# Altium PCB PCB1.PcbDoc
Units mil, origin at the board's own origin, x right, y up, seen from the top; angles counter-clockwise.
Board outline 3149.61 x 3937.01 mil, 2 copper layers (Top Layer, Bottom Layer); 99 components, 61 nets, 308 pads, 758 vias.
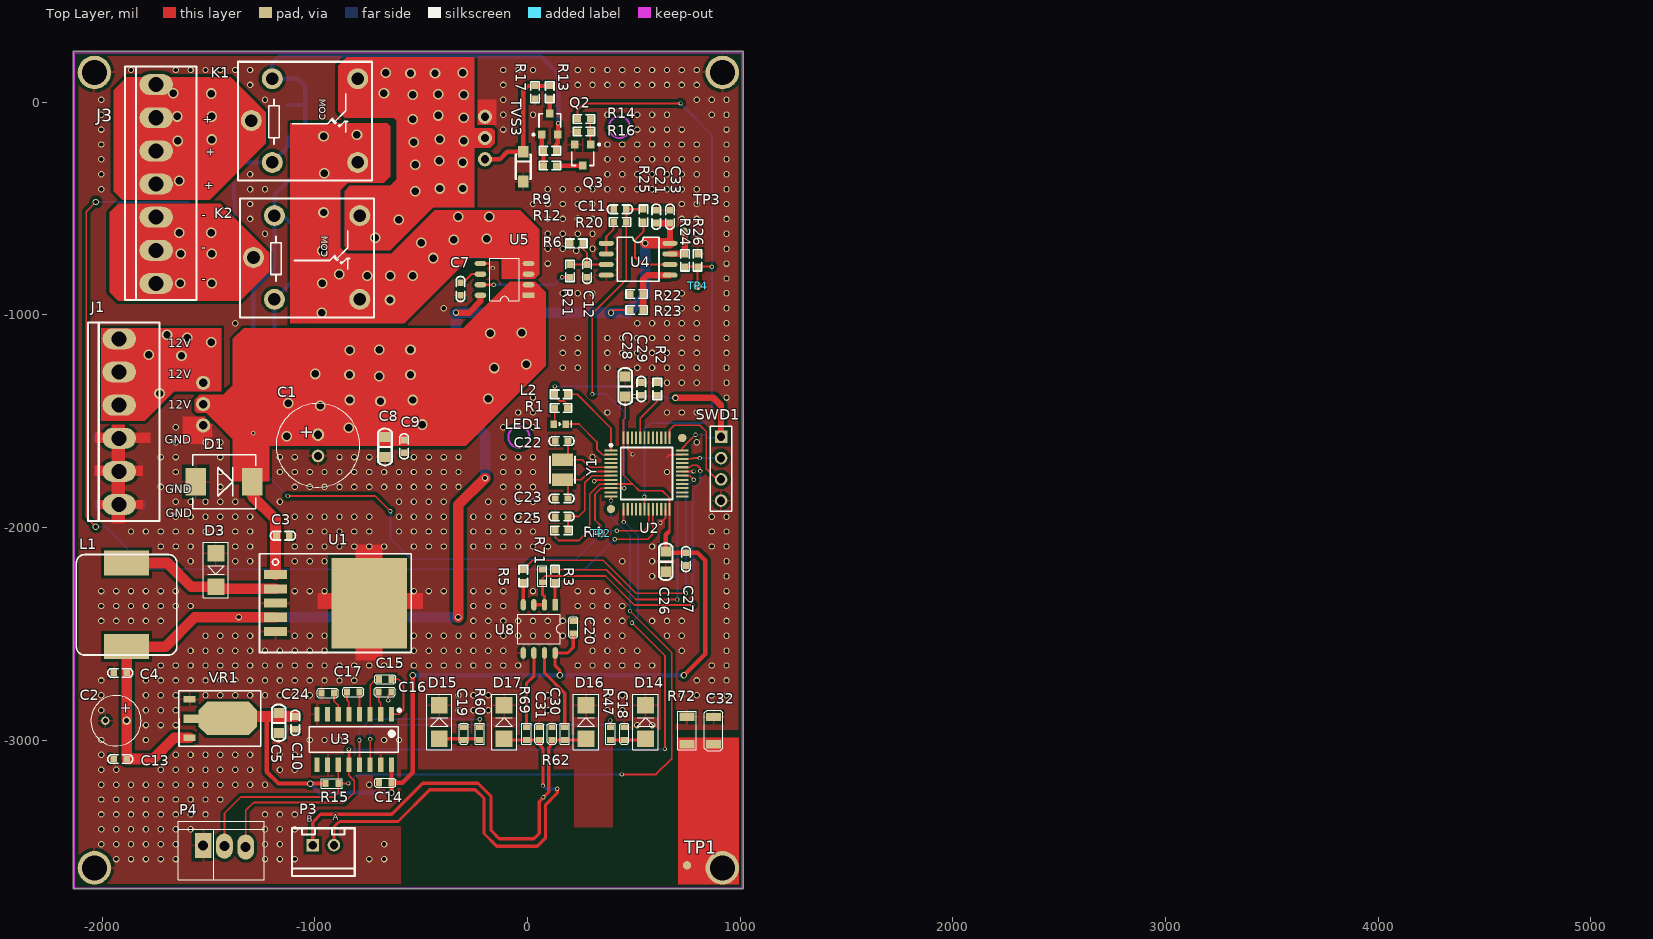
[diagram p0: Top Layer view]
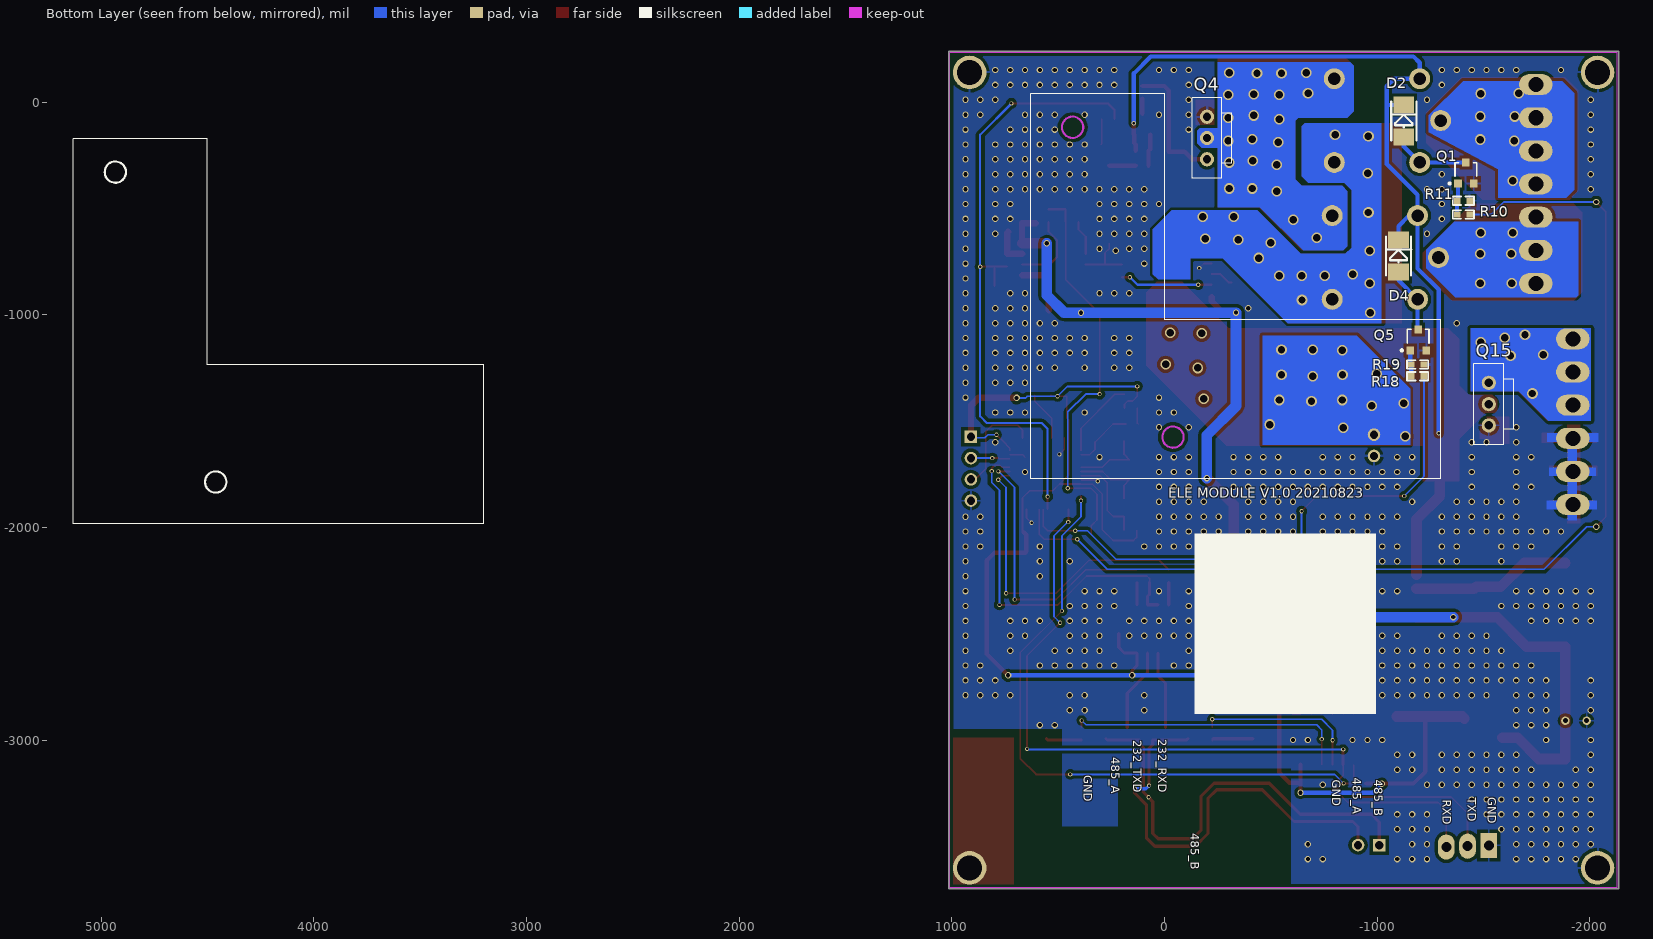
[diagram p1: Bottom Layer view, seen from below]
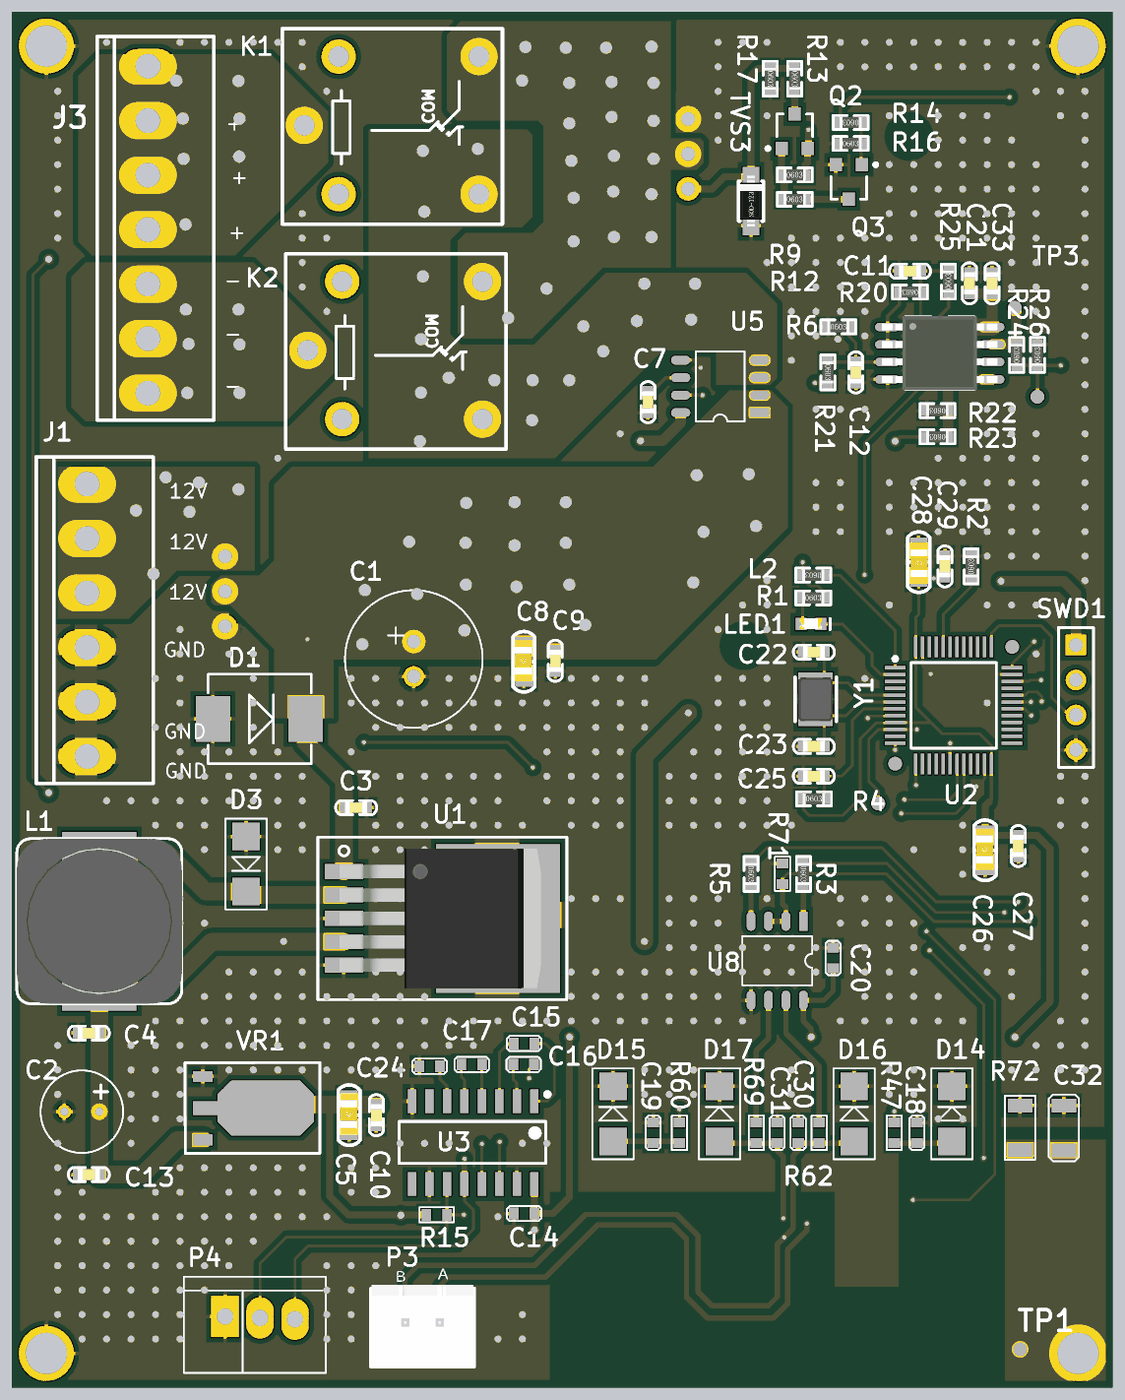
[diagram p2: 3D render of the assembled board from above, using the file's embedded part models]
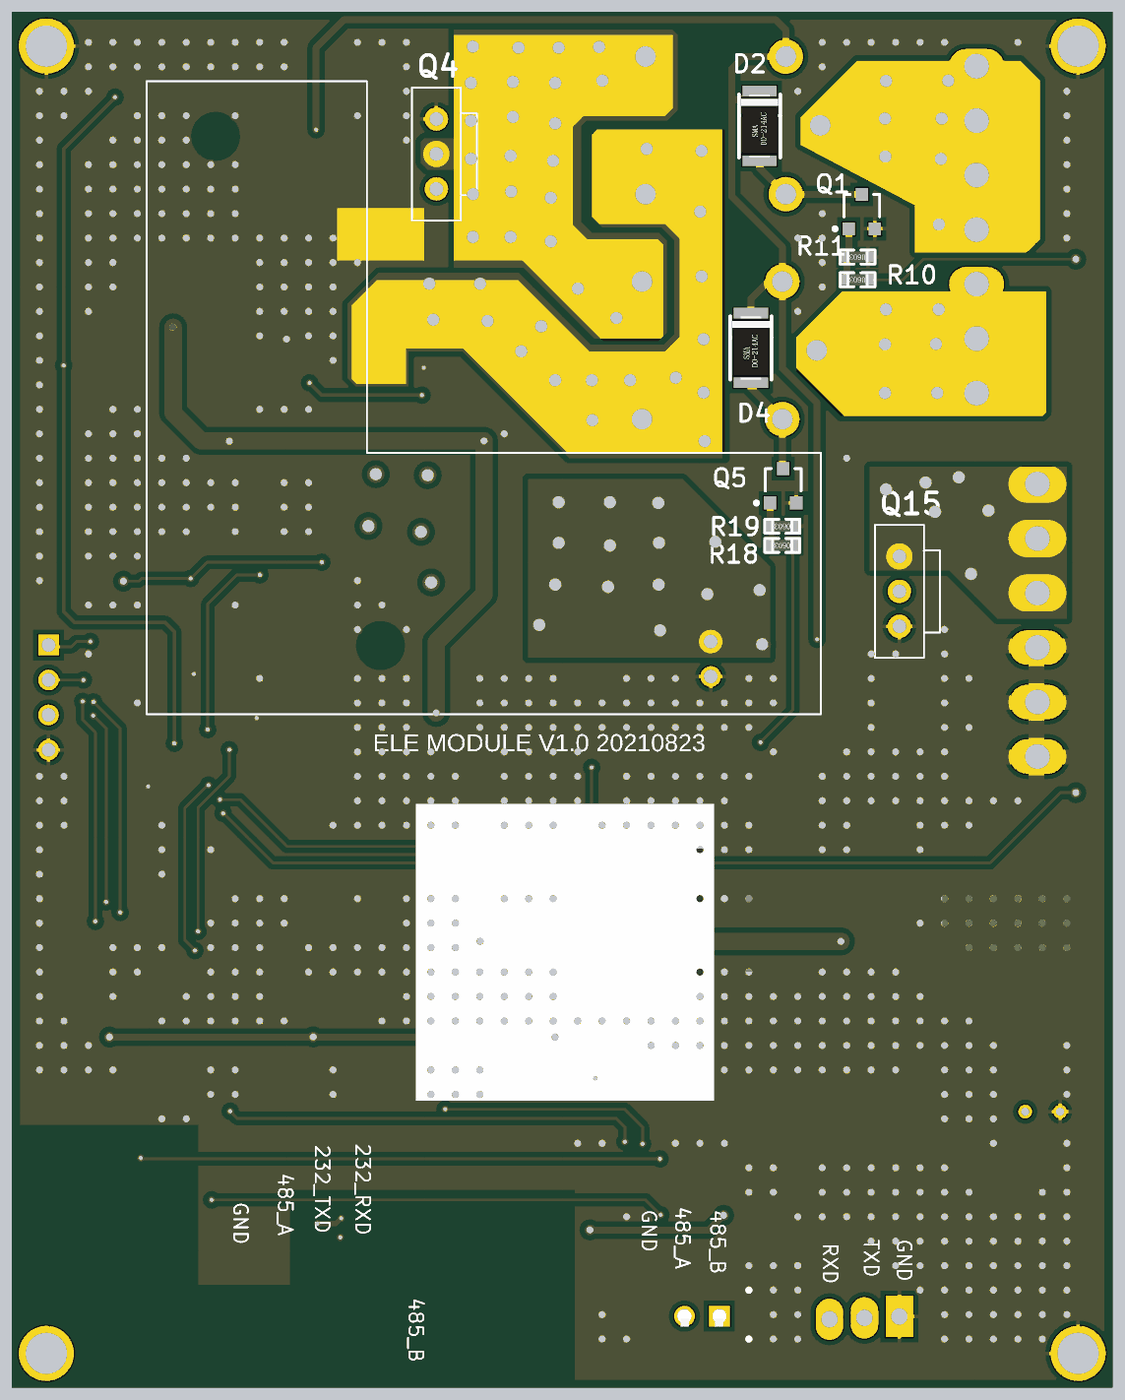
[diagram p3: 3D render of the assembled board from below, using the file's embedded part models]

## Layer stack, top to bottom
Top Layer: signal copper 1.4
Dielectric: dielectric 12.6, FR-4, Dk 4.8
Bottom Layer: signal copper 1.4

## Board outline
-2135,-3698.62 -2135,238.39 1014.61,238.39 1014.61,-3698.62

## Design rules (kind name [scope] priority, off if disabled: settings)
Clearance gnd [All] p1: gap=15
Clearance [All] p2: gap=10
DiffPairsRouting [All] p1: maxlimit=10 minlimit=10 mostfreqgap=10 maxuncoupledlength=500
MinimumSolderMaskSliver [All] p1: minsoldermaskwidth=1
PolygonConnect PolygonConnect_1 [isvia] p1: connectstyle=Direct reliefconductorwidth=10 reliefentries=4 polygonreliefangle="90 Angle"
PolygonConnect [All] p2: connectstyle=Relief reliefconductorwidth=10 reliefentries=4 polygonreliefangle="90 Angle"
RoutingVias [All] p1: holewidth=28 width=50 viastyle="Through Hole" minholewidth=28 minwidth=50 maxholewidth=28 maxwidth=50
SilkscreenOverComponentPads SilkToSolderMaskClearance [IsPad] p1: minsilkscreentomaskgap=1
SolderMaskExpansion [All] p1: expansion=4
Width [All] p1: maxlimit=500 minlimit=5 preferedwidth=10
25 further rules are at their usual default settings.

## Classes and differential pairs
component class 02_Power: C1 C2 C3 C4 C5 C8 C9 C10 C13 D1 D3 J1 L1 Q15 U1 VR1
component class 03_MCU: C22 C23 C25 C26 C27 C28 C29 L2 LED1 R1 R2 R3 R4 R5 SWD1 U2 Y1
component class 07_EL_CON: C7 C11 C12 C21 C33 C? D2 D4 J3 K1 K2 Q1 Q2 Q3 Q4 Q5 R6 R9 R10 R11 R12 R13 R14 R16 R17 R18 R19 R20 R21 R22 R23 R24 R25 R26 R? TP2 TP3 TP4 TVS3 U4 U5 U?
component class com: C14 C15 C16 C17 C18 C19 C20 C24 C30 C31 C32 D14 D15 D16 D17 P3 P4 R15 R47 R60 R62 R69 R71 R72 TP1 U3 U8
differential pair 485: +485_P -485_N

## Components (designator, comment, footprint, x,y, rotation, side; value= is the part's Value field where it differs from the comment)
C1 "1000uF/35V" 10*16 -985,-1613.62 r90 top
C2 "100uF/35V" 6*8 -1935,-2908.62 r0 top
C3 "104 50V" SMD-0603C -1150,-2038.62 r180 top
C4 "104 50V" SMD-0603C -1915,-2683.62 r0 top
C5 "10uF 25V" SMD-0805C -1170,-2918.62 r90 top
C7 "104 50V" SMD-0603C -315,-878.62 r270 top
C8 "10uF25V" SMD-0805C -670,-1621.38 r90 top
C9 "104 50V" SMD-0603C -580,-1618.62 r90 top
C10 "104 50V" SMD-0603C -1092.32,-2918.64 r90 top
C11 "NC" SMD-0603C 435,-503.62 r0 top
C12 "104 50V" SMD-0603C 280,-793.62 r270 top
C13 "104 50V" SMD-0603C -1915,-3088.62 r0 top
C14 "104 50V" 0603C -639.57,-3200.14 r180 top
C15 "104 50V" 0603C -640,-2713.62 r180 top
C16 "104 50V" 0603C -700,-2773.62 r0 top
C17 "104 50V" 0603C -849.06,-2773.62 r0 top
C18 "220PF/16V" 0603C 455,-2998.62 r90 top
C19 "220PF/16V" 0603C -300,-2998.62 r90 top
C20 "104 50V" 0603C 215,-2498.62 r90 top
C21 "104 50V" SMD-0603C 605,-538.62 r270 top
C22 "12P 50V" SMD-0603C 160,-1593.62 r180 top
C23 "12P 50V" SMD-0603C 160,-1863.62 r180 top
C24 "104 50V" 0603C -910,-2778.62 r180 top
C25 "104 50V" SMD-0603C 160,-1948.62 r0 top
C26 "10uF 25V" SMD-0805C 650,-2160.87 r90 top
C27 "104 50V" SMD-0603C 745,-2148.62 r90 top
C28 "10uF 25V" SMD-0805C 460,-1336.38 r270 top
C29 "104 50V" SMD-0603C 535,-1348.62 r270 top
C30 "220PF/16V" 0603C 115,-2998.62 r90 top
C31 "220PF/16V" 0603C 55,-2998.62 r90 top
C32 "1NF/2KV" 1206C 875.55,-2890.99 r270 top
C33 "104 50V" SMD-0603C 670,-538.62 r270 top
D1 "SMCJ24CA" SMC -1560,-1785 r0 top
D2 "1N4007" DO-214-AC -1125,-88.62 r90 bottom
D3 "SS34" SMA -1465,-2121.14 r270 top
D4 "1N4007" DO-214-AC -1100,-723.62 r90 bottom
D14 "SMAJ18CA" SMA 555,-2993.62 r90 top
D15 "SMAJ18CA" SMA -415,-2993.62 r90 top
D16 "SMAJ6.5CA" SMA 275,-2993.62 r90 top
D17 "SMAJ6.5CA" SMA -110,-2993.62 r90 top
J1 "HEADER_6" VH-AW-3.96*6P -1920,-1658.62 r90 top
J3 "Header 7" VH-AW-3.96*7P -1746,-619 r90 top
K1 "SRA-12VDC-CL-5" "SRA- 12V" -1298.43,-86.77 r270 top
K2 "SRA-12VDC-CL-5" "SRA- 12V" -1288.43,-730.47 r270 top
L1 "33uH/5a" CDRH-127 -1885,-2363.62 r270 top
L2 "MPZ1608D101BTA00" SMD-0603 157.9,-1373.62 r180 top
LED1 "LED G" SMD-0603D 151.27,-1513.15 r0 top
P3 "XH2.54 2P" SIP-2A -960,-3493.62 r0 top
P4 "1*3P" 3X2.54MMZ2 -1525,-3494.69 r0 top
Q1 "SS8050" SOT-23 -1417.5,-333.62 r180 bottom
Q2 "S8550" SOT-23 105,-103.62 r0 top
Q3 "SS8050" SOT-23 260,-248.62 r180 top
Q4 "AOT2610L" to220 -200,-268.62 r90 bottom
Q5 "SS8050" SOT-23 -1192.5,-1117.83 r180 bottom
Q15 "AOTF4185" to220 -1525,-1520 r90 bottom
R1 "1K" SMD-0603 157.9,-1438.62 r0 top
R2 "100K" SMD-0603 610,-1348.62 r90 top
R3 "1K" SMD-0603 130,-2228.62 r270 top
R4 "100K" SMD-0603 160,-2013.62 r0 top
R5 "1K" SMD-0603 -20,-2228.62 r270 top
R6 "10K" SMD-0603 230,-663.23 r0 top
R9 "47K" SMD-0603 105,-228.62 r0 top
R10 "1K" SMD-0603 -1405,-528.62 r0 bottom
R11 "47K" SMD-0603 -1405,-463.62 r0 bottom
R12 "2K" SMD-0603 105,-298.62 r0 top
R13 "1K" SMD-0603 105,46.38 r270 top
R14 "4.7K" SMD-0603 265,-78.62 r180 top
R15 "4.7K" 0603R -949.06,-3203.62 r0 top
R16 "10K" SMD-0603 265,-138.62 r0 top
R17 "4.7K" SMD-0603 35,46.38 r270 top
R18 "1K" SMD-0603 -1190,-1288.62 r0 bottom
R19 "47K" SMD-0603 -1190,-1233.62 r0 bottom
R20 "100R" SMD-0603 435,-563.62 r180 top
R21 "10K" SMD-0603 200,-793.62 r270 top
R22 "10K" SMD-0603 513.51,-902.87 r180 top
R23 "37K" SMD-0603 513.51,-977.87 r180 top
R24 "20K" SMD-0603 740,-743.62 r90 top
R25 "47K" SMD-0603 545,-533.62 r90 top
R26 "30K" SMD-0603 800,-743.62 r90 top
R47 "22R 5%" 0603R 390,-2939.57 r270 top
R60 "22R 5%" 0603R -225,-2939.57 r270 top
R62 "8.2R 5%" 0603R 175,-2939.57 r270 top
R69 "8.2R 5%" 0603R -5,-2939.57 r270 top
R71 "10K" 0603R 70,-2257.68 r90 top
R72 "10M 5%" 1206r 750,-2890.67 r270 top
SWD1 "SIP-4 (NC)" SIP-4 910,-1723.62 r270 top
TP1 "TPS" tpd 750,-3588.62 r90 top
TP2 "TPS" tpd 344.44,-2027.21 r0 top
TP3 "TPS" tpd 735,-608.62 r0 top
TP4 "TPS" tpd 799.57,-863.2 r0 top
TVS3 "SMF10CA" SOD-123 -20,-303.62 r90 top
U1 "LM2596S 5.0V" TO-263-5 -1185,-2355.55 r270 top
U2 "GD32F103C8T6" LQFP48 392.52,-1638.03 r0 top
U3 "TPT3232E-SO3R/NC" SO-16Z -640,-2878.62 r270 top
U4 "OPA2376AIDR" SOIC-8 520,-738.62 r0 top
U5 "ACS712ELCTR-20A-T" SO-8 5,-908.62 r180 top
U8 "TP8485E-SR" SO-8 130,-2363.62 r270 top
VR1 "LM1117 3.3V" SOT223 -1588.94,-2808.07 r270 top
Y1 "8MHz" XTAL-3225-2 165,-1728.62 r270 top

## Footprints (in the part's own frame and the unit in brackets; to place one, negate y for a bottom-side part, rotate by r counter-clockwise, add the part's x,y. Pads: shape width x height; smd on the part's side, far side on the other; paste and mask are expansions set on the pad)
3X2.54MMZ2 [mm]
  rect 2x3 hole 1.2: 1(0,0)
  oval 2x3 hole 1.2: 2(2.54,-0.1) 3(5.08,-0.2)
  silkscreen extent -3,-4.1 7.31,2.9
6*8 [mm]
  round 1 hole 0.6: 1(1.27,0) 2(-1.27,0)
  silkscreen extent -3,-3 3,3
10*16 [mm]
  round 1.5 hole 1: 1(1.27,0) 2(-1.27,0)
  silkscreen extent -5,-5 5,5
0603C [mm]
  rect 0.7x0.85 smd: 1(0,0) 2(1.5,0)
  silkscreen extent -0.5,-0.55 2,0.55
0603R [mm]
  rect 0.7x0.85 smd: 1(0,0) 2(1.5,0)
  silkscreen extent -0.5,-0.55 2,0.55
1206C [mm]
  rect 1x1.8 smd: 1(0,0) 2(3.25,0)
  silkscreen extent -0.8,-1.1 4.05,1.1
1206r [mm]
  rect 1x1.8 smd: 1(0,0) 2(3.25,0)
  silkscreen extent -0.7,-1.1 3.95,1.1
CDRH-127 [mm]
  rect 3x5.4 smd: 1(-5,0) 2(5,0)
  silkscreen extent -6,-6 6,6, body extent -6,-6 6,6, height 8.2
DO-214-AC [mm]
  rect 2x2.5 smd: 1(-1.915,0) 2(1.915,0)
  silkscreen extent -2.3,-1.52 2.3,1.5, body extent -2.3,-1.35 2.3,1.35, height 2.4
LQFP48 [mm]
  round 1 smd: 0(0,-6.985) 0(8.509,1.5)
  rect 1.5x0.25 smd: 1(0,0) 2(0,-0.5) 3(0,-1) 4(0,-1.5) 5(0,-2) 6(0,-2.5) 7(0,-3) 8(0,-3.5) 9(0,-4) 10(0,-4.5) 11(0,-5) 12(0,-5.5) 25(8.495,-5.5) 26(8.495,-5) 27(8.495,-4.5) 28(8.495,-4) 29(8.495,-3.5) 30(8.495,-3) 31(8.495,-2.5) 32(8.495,-2) 33(8.495,-1.5) 34(8.495,-1) 35(8.495,-0.5) 36(8.495,0)
  rect 0.25x1.5 smd: 13(1.5,-7) 14(2,-7) 15(2.5,-7) 16(3,-7) 17(3.5,-7) 18(4,-7) 19(4.5,-7) 20(5,-7) 21(5.5,-7) 22(6,-7) 23(6.5,-7) 24(7,-7) 37(7,1.5) 38(6.5,1.5) 39(6,1.5) 40(5.5,1.5) 41(5,1.5) 42(4.5,1.5) 43(4,1.5) 44(3.5,1.5) 45(3,1.5) 46(2.5,1.5) 47(2,1.5) 48(1.5,1.5)
  silkscreen extent -0.13,-5.86 7.35,0.76
SIP-2A [mm]
  rect 1.5x1.5 hole 1: 1(-1.27,0)
  round 1.5 hole 1: 2(1.27,0)
  silkscreen extent -3.75,-3.68 3.75,2.02, body extent -3.7,-3.81 3.7,2.29, height 7.5
SIP-4 [mm]
  rect 1.5x1.5 hole 1: 1(-3.81,0)
  round 1.5 hole 1: 2(-1.27,0) 3(1.27,0) 4(3.81,0)
  silkscreen extent -5.08,-1.27 5.08,1.27
SMA [mm]
  rect 2x2 smd: 1(0,0) 2(4,0)
  silkscreen extent -1.3,-1.5 5.3,1.5
SMC [mm]
  rect 2.5x3.3 smd: 1(0,0) 2(6.75,0)
  silkscreen extent -0.35,-3.25 7.15,3.25
SMD-0603 [mil]
  rect 31.5x30 smd: 1(-30,0) 2(30,0)
  silkscreen extent -50,-20 50,20, body extent -31,-16 31,16, height 18
SMD-0603C [mil]
  rect 31.5x30 smd: 1(-30,0) 2(30,0)
  silkscreen extent -59,-20 59,20, body extent -32,-16 32,16, height 31
SMD-0603D [mm]
  rect 0.8x0.9 smd: 1(-0.7,-0.012) 2(0.73,-0.012)
  silkscreen extent -0.08,-0.41 1.4,0.39, body extent -0.8,-0.39 0.8,0.41, height 0.6
SMD-0805C [mm]
  rect 1.2x1.27 smd: 1(-1.2,0) 2(1.2,0)
  silkscreen extent -2.2,-0.8 2.2,0.8, body extent -1.42,-0.67 1.58,0.73, height 0.93
SO-8 [mil]
  rect 55x25 smd: 1(0,0)
  oval 55x25 smd: 2(0,-50) 3(0,-100) 4(0,-150) 5(226.38,-150) 6(226.38,-100) 7(226.38,-50) 8(226.38,0)
  silkscreen extent 43,-175 183,25
SO-16Z [mil]
  rect 68x24 smd: 1(0,0) 2(0,-50) 3(0,-100) 4(0,-150) 5(0,-200) 6(0,-250) 7(0,-300) 8(0,-350) 9(237.11,-350) 10(237.11,-300) 11(237.11,-250) 12(237.11,-200) 13(237.11,-150) 14(237.11,-100) 15(237.11,-50) 16(237.11,0)
  silkscreen extent -19,-387 178,38
SOD-123 [mm]
  rect 1.4x1.2 smd: 1(-1.778,0) 2(1.778,0)
  silkscreen extent -1.45,-0.9 1.45,0.9, body extent -1.85,-0.8 1.85,0.8, height 1.2
SOIC-8 [mm]
  oval 1.8x0.6 smd: 1(-3.8,1.905) 2(-3.8,0.635) 3(-3.8,-0.635) 4(-3.8,-1.905) 5(3.8,-1.905) 6(3.8,-0.635) 7(3.8,0.635) 8(3.8,1.905)
  silkscreen extent -2.5,-2.64 2.5,2.64, body extent -4.2,-2.69 4.2,2.69, height 2.3
SOT223 [mm]
  rect 0.8x1.4 smd: 1(0,0) 3(4.6,0)
  rect 1x1.854 smd: 2(2.3,0.227)
  oct 4x7 smd: 4(2.286,4.572)
  silkscreen extent -1.02,-1.3 5.59,8.51
SOT-23 [mm] "SOT-23; 3 Leads; Body 3.0 x 2.6 mm, inc. leads (LxW max)"
  rect 0.9x0.95 smd: 1(-0.95,-1.25) 2(0.95,-1.25) 3(0,1.25)
  silkscreen extent -2.08,-1.37 1.3,1.25
"SRA- 12V" [mm]
  round 2.5 hole 1.5: 1(0,0) 2(5,12.7) 3(-5,12.7) 4(5,2.5) 5(-5,2.5)
  silkscreen extent -7.03,-1.59 7.17,14.41
to220 [mm]
  round 1.7 hole 1: 1(0,0) 2(2.54,0) 3(5.08,0)
  silkscreen extent -2.29,-2.95 7.37,1.78
TO-263-5 [mm]
  rect 1.1x2.8 smd: 1(-3.4,0) 2(-1.7,0) 3(0,0) 4(1.7,0) 5(3.4,0)
  rect 10.8x9 smd: 6(0,11.2)
  silkscreen extent -5.9,-1.9 5.9,16.2, body extent -5.08,-0.32 5.08,14.32, height 4.57
tpd [mm]
  round 1 smd: 1(0,0)
VH-AW-3.96*6P [mm]
  oval 2.5x4 hole 1.8: 1(-5.94,0) 2(-1.98,0) 3(1.98,0) 4(5.94,0) 5(9.9,0) 6(13.86,0)
  silkscreen extent -7.89,-4.8 15.82,3.7
VH-AW-3.96*7P [mm]
  oval 2.5x4 hole 1.8: 1(-5.94,0) 2(-1.98,0) 3(1.98,0) 4(5.94,0) 5(9.9,0) 6(13.86,0) 7(17.82,0)
  silkscreen extent -7.89,-4.8 19.96,3.7
XTAL-3225-2 [mm]
  rect 1.5x2.5 smd: 1(-1.2,0) 2(1.2,0)
  silkscreen extent -1.6,-1.5 1.6,1.5, body extent -1.6,-1.25 1.6,1.25, height 0.9

## Part data
C1 C2: library part CAP2, "电解电容"
C3 C4 C8 C9 C10 C11 C12 C13: library part CAP4, "贴片电容 10%"
C5 C21 C25 C26 C27 C28 C29 C33: library part CAP4, "贴片电容 20%"
C7: library part C, "贴片电容 10%"
C14 C15 C16 C17 C18 C19 C20 C24 C30 C31 C32: library part CAP
C22 C23: library part CAP4, "贴片电容 5%"
D1 D3: library part DIODE
D2 D4: library part DIODE2, "贴片二极管"
D14 D15 D16 D17: library part D_ESD
J3: "Header, 7-Pin"
K1 K2: library part JDQ1, "5V 继电器"
L1: library part IND
L2: library part CIZHU1, "磁珠电感 100R 100MHz"
LED1: library part LED, "绿色普亮"
P3: library part SIP-2, "XH2.54 2P 直插"
P4: library part HDR1*3
Q1 Q3 Q5: library part NPN-1, "三极管"
Q2: library part PNP, "PNP"
Q4: library part SI7860
Q15: library part "MOSFET N", "MOSFET N"
R1 R20: library part RES0, "贴片电阻 5%"
R2 R3 R4 R5 R10 R11 R18 R19: library part RES2, "贴片电阻 5%"
R6 R21: library part RES0, "贴片电阻 1%"
R9 R12 R13 R14 R16 R17 R22 R23 R24 R25 R26: library part RES-SOP, "贴片电阻 5%"
R15 R47 R60 R62 R69 R71 R72: library part RES
SWD1: library part SIP-4, "ISP 下载"
TVS3: library part TVS-1, "TVS 10V"
U1: library part LM2596
U2: library part STM32F103C6
U3: library part TPT3232E-SO3R
U4: library part LM358, "运算放大器"
U5: library part ACS712, "HALL 20A 电流传感器"
VR1: library part LM1117, "三端稳压器"
Y1: library part XTAL, "3225 贴片晶振"

## Free pads (board coordinates)
  round 157.48 hole 118.11: 0(-2036.57,-3600.2) 0(-2036.57,139.96) 0(916.18,-3600.2) 0(916.18,139.96)

## Via types
v1: diameter 30, hole 20, Top Layer to Bottom Layer, tented both sides, 636 vias
v2: diameter 50, hole 35, Top Layer to Bottom Layer, tented both sides, 79 vias
v3: diameter 20, hole 12, Top Layer to Bottom Layer, tented both sides, 43 vias

## Nets (pads, with @x,y where several pads share a name; then routed paths per layer and width w, separated by ;. In a path a pad name is that pad's centre, name@x,y a point inside that pad or via, vN(x,y) a via of type N, cw(c..) or ccw(c..) an arc to the next point about the centre after c; other vN are vias at no path point)
3.3V: C5.2 C10.2 C14.1 C20.1 C26.2 C27.2 C28.2 C29.2 L2.2 R1.2 R4.1 R15.1 SWD1.1 U2.9 U2.24 U2.36 U2.48 U3.16 U8.8 VR1.2 VR1.4 | length 7241
  Top Layer w8: C14.1@-640,-3199.71 C14.1 ; v3(127.9,-1336.73) L2.2 127.9,-1383.37 149.51,-1404.98 173.02,-1404.98 187.9,-1419.86 R1.2 ; R4.1 130,-2045.52 145.62,-2061.14 241.74,-2061.14 292.84,-2010.05 292.84,-1842.27 338.83,-1796.28 391.76,-1796.28 U2.9 494.04,-1795.51 ; C29.2 530,-1383.62 C28.2 460,-1484.91 451.57,-1493.34 U2.48 451.57,-1753.05 494.04,-1795.51 ; U2.24 668.11,-1861.52 633.86,-1827.26 525.79,-1827.26 494.04,-1795.51 ; U2.36 726.97,-1627.17 761.2,-1592.93 761.2,-1592.42 v3(790,-1563.62)
  Top Layer w10: 661.67,-2022.15 668.11,-2015.71 U2.24
  Top Layer w15: v1(152.36,-2694.69) 152.36,-2671.99 130,-2649.62 U8.8 188.62,-2590 215,-2563.62 C20.1
  Top Layer w20: -1226.03,-2888.64 -1226.03,-3148.9 -1171.3,-3203.62 R15.1 ; C14.1@-640,-3199.71 U3.16 ; v1(-639.57,-3246.84) C14.1 -587.23,-3200.14 -539.35,-3152.26 v1(-539.35,-2695.02) ; 661.67,-2022.15 650,-2033.82 C26.2 655,-2118.62 C27.2 799.85,-2118.62 835.64,-2154.41 835.64,-2594.9 v1(735.52,-2695.02)
  Top Layer w30: v1(695.52,-1390.87) 874.78,-1390.87 910,-1426.1 SWD1.1
  Top Layer w50: VR1.4 -1399.5,-2888.64 -1226.03,-2888.64 C10.2
  Bottom Layer w8: v3(127.9,-1336.73) 456.85,-1336.73 v3(503.11,-1383) 644.58,-1383 652.45,-1390.87 v1(695.52,-1390.87) ; v3(790,-1563.62) 830,-1563.62 845,-1578.62 905,-1578.62 SWD1.1
  Bottom Layer w20: v1(-1021.99,-3205.11) -979.79,-3247.31 v1@-639.57,-3247.31 ; v1(-539.35,-2695.02) v1(735.52,-2695.02)
485_N: C30.1 D16.1 P3.1 R62.2 | length 2128.6
  Top Layer w15: P3.1@-1010,-3498.62 P3.1 -1010,-3413.62 -1010,-3406 -1010,-3385.44 -973.18,-3348.62 -638.65,-3348.62 -492.38,-3202.35 -232.95,-3202.35 -171.62,-3263.68 -171.62,-3424.22 -132.22,-3463.62 -80,-3463.62 ; -45,-3463.62 -80,-3463.62 ; D16.1 270,-2998.62 R62.2 C30.1 115,-3019.9 100,-3034.9 100,-3243.62 v3(75,-3268.62) 55,-3288.62 55,-3438.62 30,-3463.62 -80,-3463.62
485_P: C31.1 D17.1 P3.2 R69.2 | length 2102.3
  Top Layer w15: P3.2@-910,-3502.56 P3.2 -910,-3428.62 -910,-3406.97 -885.42,-3382.39 -609.03,-3382.39 -459.42,-3232.78 -245.15,-3232.78 -204.58,-3273.35 -204.58,-3439.04 -145,-3498.62 45,-3498.62 85,-3458.62 85,-3303.62 140,-3248.62 v3(140,-3228.62) ; D17.1 -105,-2998.62 R69.2 C31.1 55,-3019.9 72.5,-3037.4 v3(72.5,-3213.62)
  Bottom Layer w15: v3(72.5,-3213.62) 87.5,-3228.62 v3(140,-3228.62)
ELE_PWM: R14.2 R24.1 R26.1 TP4.1 U2.18 | length 3006.5
  Top Layer w10: R14.2 235,-36.91 265.76,-6.15 v3(719.65,-6.15) ; U2.18 v3(550,-1854.65) ; R24.1 R26.1 ; TP4.1 800,-862.77 R26.1 ; v3(866.64,-773.62) R26.1
  Bottom Layer w10: v3(550,-1854.65) 550,-1535.72 576.26,-1509.47 834.82,-1509.47 866.64,-1477.64 v3(866.64,-773.62) 866.64,-153.15 v3(719.65,-6.15)
EN1_485: R71.1 U2.32 U8.2 U8.3 | length 1696.7
  Top Layer w8: R71.1 70,-2240.95 82.58,-2228.37 150.8,-2228.37 150.89,-2228.28 366.61,-2228.28 502.54,-2364.2 v3(775.85,-2364.2) ; U2.32 763.8,-1716.77 773.14,-1707.44 797.83,-1707.44 812.15,-1721.76 v3(812.15,-1734.95)
  Top Layer w15: U8.3 U8.2 80,-2323.62 70,-2313.62 R71.1
  Bottom Layer w8: v3(775.85,-2364.2) 775.85,-1824.61 812.15,-1788.31 v3(812.15,-1734.95)
GND: C1.2 C2.2 C3.1 C4.1 C5.1 C7.2 C8.1 C9.1 C10.1 C11.1 C12.2 C13.1 C14.2 C16.2 C18.2 C19.2 C20.2 C21.1 C22.2 C23.2 C24.2 C25.1 C26.1 C27.1 C28.1 C29.1 C30.2 C31.2 C32.1 C33.1 D1.1 D3.1 D14.2 D15.2 D16.2 D17.2 J1.1 J1.2 J1.3 P4.1 pad.0@916.18,139.96 pad.0@-2036.57,139.96 pad.0@-2036.57,-3600.2 Q1.2 Q3.2 Q4.3 Q5.2 Q15.1 R2.2 R6.1 R11.1 R16.1 R17.2 R19.1 R22.2 R26.2 R71.2 R72.1 SWD1.4 TVS3.1 U1.3 U1.5 U1.6 U2.8 U2.23 U2.35 U2.47 U3.8 U3.10 U3.15 U4.4 U5.5 U8.5 VR1.1 | length 439.1
  Top Layer w8: v3@-651.98,-2810.35 v3(-654.7,-2813.07) -654.7,-2787.38 C16.2 ; U5.5 -185.69,-758.62 v3@-161.85,-782.46 ; v3@313.63,-1782.78 319.83,-1776.59 391.76,-1776.59 U2.8 ; U2.47 471.26,-1633.6 v3(494.04,-1656.38) ; v3@625,-1980.12 648.43,-1956.7 U2.23 ; 655.78,-1669.14 667.2,-1657.72 U2.35
  other v1: -1934.22,-3559.14 -1864.22,-3559.14 -1794.22,-3559.14 -1724.22,-3559.14 -1654.22,-3559.14 -1234.22,-3559.14 -1164.22,-3559.14 -1094.22,-3559.14 -744.22,-3559.14 -674.22,-3559.14 -2004.22,-3489.14 -1934.22,-3489.14 -1864.22,-3489.14 -1794.22,-3489.14 -1724.22,-3489.14 -1654.22,-3489.14 -1234.22,-3489.14 -1164.22,-3489.14 -674.22,-3489.14 -2004.22,-3419.14 -1934.22,-3419.14 -1864.22,-3419.14 -1794.22,-3419.14 -1724.22,-3419.14 -1654.22,-3419.14 -1584.22,-3419.14 -1234.22,-3419.14 -1164.22,-3419.14 -1094.22,-3419.14 -2004.22,-3349.14 -1934.22,-3349.14 -1864.22,-3349.14 -1794.22,-3349.14 -1724.22,-3349.14 -1654.22,-3349.14 -1584.22,-3349.14 -1514.22,-3349.14 -1234.22,-3349.14 -1164.22,-3349.14 -1094.22,-3349.14 -2004.22,-3279.14 -1934.22,-3279.14 -1864.22,-3279.14 -1794.22,-3279.14 -1724.22,-3279.14 -1654.22,-3279.14 -1584.22,-3279.14 -1514.22,-3279.14 -1444.22,-3279.14 -2004.22,-3209.14 -1934.22,-3209.14 -1864.22,-3209.14 -1794.22,-3209.14 -1724.22,-3209.14 -1654.22,-3209.14 -1584.22,-3209.14 -1514.22,-3209.14 -1444.22,-3209.14 -1374.22,-3209.14 -1304.22,-3209.14 -1234.22,-3209.14 -744.22,-3209.14 -2004.22,-3139.14 -1934.22,-3139.14 -1724.22,-3139.14 -1654.22,-3139.14 -1584.22,-3139.14 -1514.22,-3139.14 -1444.22,-3139.14 -1374.22,-3139.14 -1304.22,-3139.14 -1164.22,-3139.14 -1094.22,-3139.14 -2004.22,-3069.14 -1654.22,-3069.14 -1584.22,-3069.14 -1514.22,-3069.14 -1444.22,-3069.14 -1374.22,-3069.14 -1304.22,-3069.14 -1164.22,-3069.14 -1094.22,-3069.14 -2004.22,-2999.14 -1794.22,-2999.14 -1024.22,-2999.14 -954.22,-2999.14 -884.22,-2999.14 -674.22,-2999.14 -604.22,-2999.14 -1794.22,-2929.14 -1724.22,-2929.14 -1654.22,-2929.14 515.78,-2929.14 585.78,-2929.14 -2004.22,-2859.14 -1794.22,-2859.14 -1724.22,-2859.14 -1654.22,-2859.14 -324.22,-2859.14 -254.22,-2859.14 -184.22,-2859.14 95.78,-2859.14 375.78,-2859.14 445.78,-2859.14 -2004.22,-2789.14 -1794.22,-2789.14 -1724.22,-2789.14 -1654.22,-2789.14 -1514.22,-2789.14 -1444.22,-2789.14 -1374.22,-2789.14 -1304.22,-2789.14 -1234.22,-2789.14 -1164.22,-2789.14 -1094.22,-2789.14 -1024.22,-2789.14 -324.22,-2789.14 -254.22,-2789.14 -184.22,-2789.14 95.78,-2789.14 375.78,-2789.14 445.78,-2789.14 725.78,-2789.14 795.78,-2789.14 865.78,-2789.14 935.78,-2789.14 -2004.22,-2719.14 -1794.22,-2719.14 -1724.22,-2719.14 -1654.22,-2719.14 -1584.22,-2719.14 -1514.22,-2719.14 -1444.22,-2719.14 -1374.22,-2719.14 -1304.22,-2719.14 -1234.22,-2719.14 -1164.22,-2719.14 -1094.22,-2719.14 -1024.22,-2719.14 -954.22,-2719.14 -884.22,-2719.14 -814.22,-2719.14 795.78,-2719.14 865.78,-2719.14 935.78,-2719.14 -1724.22,-2649.14 -1654.22,-2649.14 -1584.22,-2649.14 -1514.22,-2649.14 -1444.22,-2649.14 -1374.22,-2649.14 -1304.22,-2649.14 -1234.22,-2649.14 -1164.22,-2649.14 -1094.22,-2649.14 -1024.22,-2649.14 -954.22,-2649.14 -884.22,-2649.14 -814.22,-2649.14 -744.22,-2649.14 -674.22,-2649.14 -604.22,-2649.14 -534.22,-2649.14 -464.22,-2649.14 -394.22,-2649.14 -324.22,-2649.14 -254.22,-2649.14 -184.22,-2649.14 -114.22,-2649.14 -44.22,-2649.14 235.78,-2649.14 305.78,-2649.14 375.78,-2649.14 445.78,-2649.14 515.78,-2649.14 585.78,-2649.14 865.78,-2649.14 935.78,-2649.14 -1584.22,-2579.14 -1514.22,-2579.14 -1444.22,-2579.14 -1374.22,-2579.14 -1304.22,-2579.14 -1234.22,-2579.14 -1164.22,-2579.14 -1094.22,-2579.14 -1024.22,-2579.14 -954.22,-2579.14 -534.22,-2579.14 -464.22,-2579.14 -394.22,-2579.14 -324.22,-2579.14 -254.22,-2579.14 -184.22,-2579.14 -114.22,-2579.14 305.78,-2579.14 375.78,-2579.14 445.78,-2579.14 515.78,-2579.14 725.78,-2579.14 935.78,-2579.14 -1514.22,-2509.14 -1444.22,-2509.14 -1374.22,-2509.14 -1304.22,-2509.14 -1094.22,-2509.14 -1024.22,-2509.14 -954.22,-2509.14 -534.22,-2509.14 -464.22,-2509.14 -394.22,-2509.14 -324.22,-2509.14 -254.22,-2509.14 -184.22,-2509.14 -114.22,-2509.14 -44.22,-2509.14 25.78,-2509.14 95.78,-2509.14 165.78,-2509.14 305.78,-2509.14 375.78,-2509.14 445.78,-2509.14 655.78,-2509.14 725.78,-2509.14 935.78,-2509.14 -2004.22,-2439.14 -1934.22,-2439.14 -1864.22,-2439.14 -1794.22,-2439.14 -1724.22,-2439.14 -254.22,-2439.14 -184.22,-2439.14 -114.22,-2439.14 -44.22,-2439.14 25.78,-2439.14 95.78,-2439.14 165.78,-2439.14 305.78,-2439.14 375.78,-2439.14 445.78,-2439.14 585.78,-2439.14 655.78,-2439.14 725.78,-2439.14 935.78,-2439.14 -2004.22,-2369.14 -1934.22,-2369.14 -1864.22,-2369.14 -1794.22,-2369.14 -1724.22,-2369.14 -1654.22,-2369.14 -1584.22,-2369.14 -254.22,-2369.14 -184.22,-2369.14 -114.22,-2369.14 235.78,-2369.14 305.78,-2369.14 375.78,-2369.14 445.78,-2369.14 935.78,-2369.14 -2004.22,-2299.14 -1934.22,-2299.14 -1864.22,-2299.14 -1794.22,-2299.14 -1724.22,-2299.14 -1654.22,-2299.14 -1094.22,-2299.14 -1024.22,-2299.14 -954.22,-2299.14 -534.22,-2299.14 -464.22,-2299.14 -394.22,-2299.14 -254.22,-2299.14 -184.22,-2299.14 -114.22,-2299.14 25.78,-2299.14 235.78,-2299.14 305.78,-2299.14 375.78,-2299.14 935.78,-2299.14 585.78,-2229.14 935.78,-2229.14 -1584.22,-2159.14 -1374.22,-2159.14 -1304.22,-2159.14 -1094.22,-2159.14 -1024.22,-2159.14 -954.22,-2159.14 445.78,-2159.14 585.78,-2159.14 935.78,-2159.14 -1724.22,-2089.14 -1654.22,-2089.14 -1584.22,-2089.14 -1374.22,-2089.14 -1304.22,-2089.14 -1094.22,-2089.14 -1024.22,-2089.14 -954.22,-2089.14 -884.22,-2089.14 -814.22,-2089.14 -744.22,-2089.14 -674.22,-2089.14 -534.22,-2089.14 -464.22,-2089.14 -394.22,-2089.14 -254.22,-2089.14 -184.22,-2089.14 -114.22,-2089.14 -44.22,-2089.14 25.78,-2089.14 95.78,-2089.14 585.78,-2089.14 865.78,-2089.14 935.78,-2089.14 -1864.22,-2019.14 -1794.22,-2019.14 -1724.22,-2019.14 -1654.22,-2019.14 -1584.22,-2019.14 -1514.22,-2019.14 -1444.22,-2019.14 -1374.22,-2019.14 -1304.22,-2019.14 -1024.22,-2019.14 -954.22,-2019.14 -884.22,-2019.14 -814.22,-2019.14 -744.22,-2019.14 -604.22,-2019.14 -534.22,-2019.14 -464.22,-2019.14 -394.22,-2019.14 -254.22,-2019.14 -184.22,-2019.14 -114.22,-2019.14 -44.22,-2019.14 25.78,-2019.14 865.78,-2019.14 935.78,-2019.14 -1654.22,-1949.14 -1584.22,-1949.14 -1514.22,-1949.14 -1444.22,-1949.14 -1374.22,-1949.14 -1304.22,-1949.14 -1094.22,-1949.14 -1024.22,-1949.14 -954.22,-1949.14 -884.22,-1949.14 -814.22,-1949.14 -744.22,-1949.14 -604.22,-1949.14 -534.22,-1949.14 -464.22,-1949.14 -394.22,-1949.14 -254.22,-1949.14 -184.22,-1949.14 -114.22,-1949.14 -44.22,-1949.14 25.78,-1949.14 865.78,-1949.14 935.78,-1949.14 -1654.22,-1879.14 -1584.22,-1879.14 -1514.22,-1879.14 -1444.22,-1879.14 -1374.22,-1879.14 -1164.22,-1879.14 -604.22,-1879.14 -534.22,-1879.14 -464.22,-1879.14 -394.22,-1879.14 -184.22,-1879.14 -114.22,-1879.14 -44.22,-1879.14 25.78,-1879.14 -1724.22,-1809.14 -1654.22,-1809.14 -1444.22,-1809.14 -1094.22,-1809.14 -1024.22,-1809.14 -954.22,-1809.14 -884.22,-1809.14 -814.22,-1809.14 -744.22,-1809.14 -674.22,-1809.14 -604.22,-1809.14 -534.22,-1809.14 -464.22,-1809.14 -394.22,-1809.14 -324.22,-1809.14 -114.22,-1809.14 -44.22,-1809.14 25.78,-1809.14 -1654.22,-1739.14 -1444.22,-1739.14 -1164.22,-1739.14 -1094.22,-1739.14 -1024.22,-1739.14 -954.22,-1739.14 -884.22,-1739.14 -814.22,-1739.14 -744.22,-1739.14 -674.22,-1739.14 -604.22,-1739.14 -534.22,-1739.14 -464.22,-1739.14 -394.22,-1739.14 -324.22,-1739.14 -114.22,-1739.14 -44.22,-1739.14 25.78,-1739.14 655.78,-1739.14 -1724.22,-1669.14 -1654.22,-1669.14 -1444.22,-1669.14 -1164.22,-1669.14 -1094.22,-1669.14 -884.22,-1669.14 -814.22,-1669.14 -744.22,-1669.14 -534.22,-1669.14 -464.22,-1669.14 -394.22,-1669.14 -324.22,-1669.14 -114.22,-1669.14 -44.22,-1669.14 25.78,-1669.14 305.78,-1669.14 -1654.22,-1599.14 -1514.22,-1599.14 -1444.22,-1599.14 795.78,-1599.14 -1654.22,-1529.14 -114.22,-1529.14 25.78,-1529.14 -44.22,-1459.14 25.78,-1459.14 375.78,-1459.14 655.78,-1459.14 725.78,-1459.14 795.78,-1459.14 25.78,-1389.14 935.78,-1389.14 655.78,-1319.14 725.78,-1319.14 795.78,-1319.14 935.78,-1319.14 165.78,-1249.14 235.78,-1249.14 375.78,-1249.14 515.78,-1249.14 585.78,-1249.14 655.78,-1249.14 725.78,-1249.14 795.78,-1249.14 935.78,-1249.14 165.78,-1179.14 235.78,-1179.14 375.78,-1179.14 445.78,-1179.14 515.78,-1179.14 585.78,-1179.14 655.78,-1179.14 725.78,-1179.14 795.78,-1179.14 935.78,-1179.14 165.78,-1109.14 235.78,-1109.14 375.78,-1109.14 445.78,-1109.14 515.78,-1109.14 585.78,-1109.14 655.78,-1109.14 725.78,-1109.14 795.78,-1109.14 935.78,-1109.14 -1374.22,-1039.14 515.78,-1039.14 585.78,-1039.14 655.78,-1039.14 725.78,-1039.14 795.78,-1039.14 935.78,-1039.14 -394.22,-969.14 655.78,-969.14 725.78,-969.14 795.78,-969.14 935.78,-969.14 165.78,-899.14 235.78,-899.14 305.78,-899.14 655.78,-899.14 725.78,-899.14 935.78,-899.14 935.78,-829.14 95.78,-759.14 935.78,-759.14 228.7,-698.62 95.78,-689.14 165.78,-689.14 305.78,-689.14 935.78,-689.14 -1234.22,-619.14 95.78,-619.14 165.78,-619.14 235.78,-619.14 305.78,-619.14 795.78,-619.14 935.78,-619.14 -1304.22,-549.14 95.78,-549.14 165.78,-549.14 235.78,-549.14 305.78,-549.14 725.78,-549.14 795.78,-549.14 935.78,-549.14 -1304.22,-479.14 25.78,-479.14 95.78,-479.14 165.78,-479.14 235.78,-479.14 305.78,-479.14 725.78,-479.14 795.78,-479.14 935.78,-479.14 -2004.22,-409.14 -1304.22,-409.14 -1234.22,-409.14 95.78,-409.14 165.78,-409.14 235.78,-409.14 305.78,-409.14 375.78,-409.14 445.78,-409.14 515.78,-409.14 585.78,-409.14 655.78,-409.14 725.78,-409.14 795.78,-409.14 935.78,-409.14 -2004.22,-339.14 -1304.22,-339.14 375.78,-339.14 445.78,-339.14 515.78,-339.14 585.78,-339.14 655.78,-339.14 725.78,-339.14 795.78,-339.14 935.78,-339.14 -2004.22,-269.14 375.78,-269.14 445.78,-269.14 515.78,-269.14 585.78,-269.14 655.78,-269.14 725.78,-269.14 795.78,-269.14 935.78,-269.14 -2004.22,-199.14 375.78,-199.14 445.78,-199.14 515.78,-199.14 585.78,-199.14 655.78,-199.14 725.78,-199.14 795.78,-199.14 935.78,-199.14 -2004.22,-129.14 -114.22,-129.14 515.78,-129.14 585.78,-129.14 655.78,-129.14 725.78,-129.14 935.78,-129.14 -2004.22,-59.14 -114.22,-59.14 25.78,-59.14 375.78,-59.14 515.78,-59.14 585.78,-59.14 655.78,-59.14 865.78,-59.14 935.78,-59.14 -2004.22,10.86 -1234.22,10.86 -114.22,10.86 795.78,10.86 865.78,10.86 935.78,10.86 -1304.22,80.86 -114.22,80.86 235.78,80.86 305.78,80.86 375.78,80.86 445.78,80.86 515.78,80.86 585.78,80.86 655.78,80.86 725.78,80.86 795.78,80.86 -1864.22,150.86 -1654.22,150.86 -1584.22,150.86 -1514.22,150.86 -1444.22,150.86 -1374.22,150.86 -1304.22,150.86 -114.22,150.86 -44.22,150.86 25.78,150.86 235.78,150.86 305.78,150.86 375.78,150.86 445.78,150.86 515.78,150.86 585.78,150.86 655.78,150.86 725.78,150.86 795.78,150.86
  other v3: 625,-1978.25 314.14,-1782.27 -163.95,-780.36
J3-2: C19.1 D15.1 R60.2 | length 192.1
  Top Layer w15: D15.1 -230,-2993.62 R60.2
J3-3: C18.1 D14.1 R47.2 | length 167.1
  Top Layer w15: R47.2 C18.1 550,-2998.62 D14.1
LED1: LED1.2 U2.2 | length 292.1
  Top Layer w8: LED1.2 242.23,-1513.62 326.37,-1597.76 326.37,-1631.74 352.35,-1657.72 U2.2
NetC7_1: C7.1 U5.6 | length 110.2
  Top Layer w10: C7.1 -303.48,-848.62 -263.48,-808.62 U5.6
NetC11_2: C11.2 R20.1 R25.2 TP2.1 U2.10 | length 1902.5
  Top Layer w8: v3(305.15,-1372.75) 305.15,-994.71 465,-834.86 R20.1 ; TP2.1 344.44,-1991.94 317.17,-1964.68 317.17,-1843.39 345.36,-1815.2 U2.10 v3(454.6,-1815.2)
  Top Layer w10: R20.1 C11.2 R25.2
  Bottom Layer w8: v3(305.15,-1372.75) 370.97,-1372.75 454.6,-1456.38 v3(454.6,-1815.2)
NetC12_1: C12.1 R6.2 R21.1 U4.3 | length 279.1
  Top Layer w8: R6.2 260,-688.62 280,-708.62 C12.1
  Top Layer w10: R21.1 C12.1 U4.3
NetC15_1: C15.1 U3.1 | length 252.7
  Top Layer w8: U3.1 -603.66,-2878.62 -582.59,-2857.55 -582.59,-2738.87 -607.84,-2713.62 C15.1
NetC15_2: C15.2 U3.3 | length 190.3
  Top Layer w8: U3.3 -740,-2740.27 -713.35,-2713.62 C15.2
NetC16_1: C16.1 U3.2 | length 109.1
  Top Layer w8: C16.1 -700,-2817.24 -690,-2827.24 U3.2
NetC17_1: C17.1 U3.5 | length 108.8
  Top Layer w8: C17.1 -849.06,-2810.04 -840,-2819.1 U3.5
NetC17_2: C17.2 U3.4 | length 105
  Top Layer w8: U3.4 C17.2
NetC22_1: C22.1 U2.5 Y1.1 | length 340.3
  Top Layer w8: C22.1 190,-1656.38 Y1.1 257.37,-1681.38 292.76,-1716.77 U2.5
NetC23_1: C23.1 U2.6 Y1.2 | length 342
  Top Layer w8: C23.1 190,-1800.87 Y1.2 252.31,-1775.87 291.72,-1736.46 U2.6
NetC24_1: C24.1 U3.6 | length 108.3
  Top Layer w8: C24.1 -910,-2816.2 -890,-2836.2 U3.6
NetC32_2: C32.2 pad.0@916.18,-3600.2 R72.2 TP1.1
NetD2_1: D2.1 K1.4 Q1.3 | length 368.5
  Bottom Layer w20: Q1.3 -1200.79,-284.41 K1.4 -1125,-208.62 D2.1
NetD3_2: D3.2 L1.1 U1.2 | length 750.5
  Top Layer w50: L1.1 -1692.56,-2166.77 -1580.71,-2278.62 D3.2 -1455,-2288.62 U1.2
NetD4_1: D4.1 K2.4 Q5.3 | length 307.9
  Bottom Layer w20: Q5.3 -1190,-1066.13 K2.4 -1100,-837.32 D4.1
NetJ1_4: J1.4 J1.5 J1.6 Q15.3
  other v2: -1730,-1370 -1626.91,-1192.4 -1780,-1188.62 -1486.7,-1128.25 -1600,-1108.62 -1695,-1093.62
NetJ3_1: J3.1 J3.2 J3.3 K2.1
  other v2: -1633.39,-852.21 -1483.85,-852.21 -1483.85,-713.62 -1629.58,-712.19 -1637.47,-613.62 -1486.7,-613.62
NetJ3_4: J3.4 J3.5 J3.6 J3.7 K1.1
  other v2: -1638.15,-370.25 -1643.87,-182.61 -1484.8,-175.94 -1646.25,-67.35 -1483.85,-67.35 -1486.7,40.28 -1664.82,41.23
NetK1_3: K1.3 K2.3 Q4.2
  other v2: -715.19,-637.9 -605,-553.62 -527.54,-418.62 -412.29,-406.12 -304.66,-406.12 -527.54,-294.05 -304.66,-283.62 -414.2,-275.95 -534.21,-188.32 -298.95,-182.61 -412.29,-174.04 -540,-81.12 -298.95,-73.62 -418.96,-62.72 -540,34.56 -298.95,34.56 -418.96,37.42 -675,41.23 -550,135.29 -435,135.29 -665.66,137.43 -304.66,138.38
NetL2_1: L2.1 U2.1 | length 375.7
  Top Layer w8: L2.1 233.24,-1373.62 392.52,-1532.9 U2.1
NetLED1_1: LED1.1 R1.1 | length 76.7
  Top Layer w8: LED1.1 127.9,-1509.43 R1.1
NetQ1_1: Q1.1 R10.2 R11.2 | length 147.9
  Bottom Layer w20: Q1.1 -1380.09,-458.53 R11.2 R10.2
NetQ2_1: Q2.1 R9.1 R12.1 | length 159.3
  Top Layer w8: Q2.1 Q2.1@75,-160.24
  Top Layer w20: Q2.1 67.6,-221.22 R9.1 R12.1
NetQ2_3: Q2.3 R13.2 | length 70.8
  Top Layer w20: Q2.3 R13.2
NetQ3_1: Q3.1 R14.1 R16.2 | length 121.8
  Top Layer w8: R14.1 R16.2 295,-197.01 Q3.1
NetQ3_3: Q3.3 R12.2 | length 125.3
  Top Layer w8: Q3.3@259.21,-298.62 Q3.3
  Top Layer w20: R12.2 Q3.3@259.21,-298.62
NetQ4_1: Q4.1 R13.1 R17.1 TVS3.2 | length 622.1
  Top Layer w20: Q4.1@-205,-268.62 -130,-268.62 -95,-233.62 TVS3.2 -20,55.2 1.18,76.38 R17.1 R13.1
NetQ5_1: Q5.1 R18.2 R19.2 | length 123.6
  Bottom Layer w20: R18.2 R19.2 -1155.09,-1228.72 Q5.1
NetR2_1: R2.1 U2.44 | length 233.4
  Top Layer w8: U2.44 530.31,-1486.65 610,-1406.96 R2.1
NetR3_1: R3.1 U2.31 | length 1320.4
  Top Layer w8: R3.1 370.19,-2198.62 510.19,-2338.62 v3(705,-2338.62) ; U2.31 v3(780.95,-1736.46)
  Bottom Layer w8: v3(705,-2338.62) 705,-1811.58 v3@780.21,-1736.37
NetR5_1: R5.1 U2.30 | length 1457.8
  Top Layer w8: R5.1 25,-2153.62 355,-2153.62 510,-2308.62 v3(745,-2308.62) ; U2.30 762.45,-1756.14 v3(782.09,-1775.78)
  Bottom Layer w8: v3(745,-2308.62) 745,-1811.74 v3@780.21,-1776.53
NetR10_1: R10.1 U2.20 | length 5071.6
  Top Layer w8: v1(-2029.89,-1996.07) -2075,-1950.96 -2075,-514.81 v1(-2029.89,-469.7) ; v3(410.16,-2055.24) 565.55,-2055.24 589.37,-2031.42 U2.20
  Bottom Layer w8: v1(-2029.89,-1996.07) -1985,-1996.07 -1784.48,-2196.59 268.81,-2196.59 v3(410.16,-2055.24) ; v1(-2029.89,-469.7) -1594.48,-469.7 -1535.56,-528.62 R10.1
NetR18_1: R18.1 U2.19 | length 2646.4
  Top Layer w8: v3(-1127.7,-1851.99) -716.25,-1851.99 v3(-644.4,-1923.84) ; v3(419.11,-2015.84) 548.39,-2015.84 569.68,-1994.54 U2.19
  Bottom Layer w8: R18.1 -1220,-1759.69 v3(-1127.7,-1851.99) v3@-1125.05,-1854.65 ; v3(-644.4,-1923.84) -644.4,-2050.03 -645,-2050.64 -545.94,-2149.7 227.96,-2149.7 361.82,-2015.84 v3(419.11,-2015.84)
NetR20_2: R20.2 U4.1 U4.2 | length 164.3
  Top Layer w10: U4.2 U4.1 370.39,-632.71 405,-598.11 R20.2
NetR21_2: R21.2 U5.7 | length 435
  Top Layer w10: U5.7 v3(-158.74,-858.62) ; v3(162.76,-823.62) R21.2
  Bottom Layer w10: v3(-158.74,-858.62) 127.17,-858.62 v3@161.97,-823.83
NetR22_1: R22.1 R23.1 U4.5 | length 279
  Top Layer w30: R23.1 R22.1 543.51,-833.05 562.94,-813.62 U4.5
NetR24_2: R24.2 TP3.1 U4.7 | length 177.5
  Top Layer w30: U4.7 R24.2 740,-613.62 TP3.1
NetR25_1: R25.1 U4.6 | length 360.2
  Top Layer w10: R25.1 545,-609.15 505,-649.15 505,-727.85 540.78,-763.62 U4.6
NetR47_1: R47.1 U3.14 | length 1343.5
  Top Layer w8: U3.14 v3@-740,-2994.89 ; R47.1 v3(390,-2907.44)
  Bottom Layer w8: v3(-739.42,-2994.89) -739.42,-2952.36 -715.24,-2928.18 369.25,-2928.18 v3(390,-2907.44)
NetR60_1: R60.1 U3.13 | length 787
  Top Layer w8: v3(-790.25,-3000.76) -790,-3001.01 U3.13 ; R60.1 v3(-225,-2901.68)
  Bottom Layer w8: v3(-790.25,-3000.76) -790.25,-2953.34 -738.59,-2901.68 v3(-225,-2901.68)
NetR62_1: R62.1 U8.7 | length 388.9
  Top Layer w15: U8.7 80,-2683.62 175,-2778.62 R62.1
NetR69_1: R69.1 U8.6 | length 364.1
  Top Layer w15: R69.1 -5,-2733.62 30,-2698.62 U8.6
RST: C25.2 R4.2 U2.7 | length 423.4
  Top Layer w8: R4.2 C25.2 240.87,-1948.62 269.57,-1919.92 269.57,-1789.85 303.28,-1756.14 U2.7
RXD1_485: R3.2 U8.1 | length 105
  Top Layer w15: U8.1 R3.2
RXD_233: P4.3 U2.13 U3.12 | length 3654.4
  Top Layer w8: P4.3 -1325,-3330.23 -1287.75,-3292.98 -861.2,-3292.98 -813.96,-3245.74 -813.96,-3191.35 -840,-3165.32 U3.12 ; U2.13 451.57,-1973.76 v3(452.2,-1974.38) ; v3(491.15,-2447.55) 646.26,-2602.66 v3(646.26,-3041.21)
  Top Layer w15: U3.12 v3(-840,-3043.62)
  Bottom Layer w8: v3(-840,-3043.62) 643.85,-3043.62 v3(646.26,-3041.21) ; v3@451.26,-1970.9 519.88,-2039.52 519.88,-2418.82 v3(491.15,-2447.55)
SWCLK: SWD1.3 U2.37 | length 497.6
  Top Layer w8: U2.37 668.11,-1540.51 690,-1518.62 810,-1518.62 840,-1548.62 840,-1723.62 890,-1773.62 SWD1.3
SWDIO: SWD1.2 U2.34 | length 184.6
  Top Layer w8: U2.34 776.22,-1677.4 780,-1673.62 v3(810,-1673.62)
  Bottom Layer w8: v3(810,-1673.62) SWD1.2
TXD1_485: R5.2 U8.4 | length 105
  Top Layer w15: U8.4 R5.2
TXD_232: P4.2 R15.2 U2.12 U3.11 | length 3826.9
  Top Layer w8: P4.2 -1425,-3343.63 -1348.57,-3267.2 -910.55,-3267.2 -890,-3246.64 R15.2 ; U3.11 R15.2 ; v3(-841.83,-3203.62) R15.2 ; v3(392.52,-1873.29) U2.12 ; v3(443.16,-3161.02) 603.85,-3161.02 677.69,-3087.18 677.69,-2588.14 v3(482.18,-2392.63)
  Bottom Layer w8: v3(-841.83,-3203.62) -799.24,-3161.02 v3(443.16,-3161.02) ; v3@392.23,-1874.27 392.23,-1948.35 482.18,-2038.3 v3(482.18,-2392.63)
VDD5V: C2.1 C4.2 C13.2 C21.2 C33.2 L1.2 R23.2 U1.4 U4.8 U5.8 VR1.3 | length 5889.9
  Top Layer w10: v1(392.57,-990.42) 405.12,-977.87 R23.2
  Top Layer w30: v1(-336.15,-989.53) -273.92,-989.53 -221.38,-936.99 U5.8@-221.38,-918.03 ; C21.2 C33.2 670,-663.23 U4.8
  Top Layer w50: VR1.3 -1660.6,-2989.17 -1760.05,-3088.62 C13.2 C2.1 C4.2 L1.2 -1701.83,-2560.47 -1563.83,-2422.48 U1.4 ; v1(-325.08,-2421.42) -325.08,-1893.39 v1(-199.36,-1767.67) ; v1(554.19,-663.62) U4.8
  Bottom Layer w50: v1(-1357.73,-2421.42) v1(-325.08,-2421.42) ; v1(-199.36,-1767.67) -199.36,-1565.67 -336.15,-1428.88 v1(-336.15,-989.53) 472.41,-989.53 553.4,-908.54 v1@553.4,-664.79
VDD12V: C1.1 C3.2 C8.2 C9.2 D1.2 D2.2 D4.2 K1.5 K2.5 Q2.2 Q15.2 R9.2 U1.1 U5.1 U5.2 | length 4538.4
  Top Layer w20: R9.2 135,-199.5 142.4,-192.1 Q2.2 144.19,-151.04 v3(144.19,-99.33)
  Top Layer w50: -1295,-1713.62 -1295,-1851.99 -1185,-1961.99 U1.1
  Bottom Layer w20: v3(-1289.4,-1557.31) -1289.4,-881.75 -1190,-782.34 K2.5 ; D2.2 -1051.11,-13.23 ; D4.2 -1100,-583.62 -1150,-533.62 K2.5 ; v3(144.19,-99.33) 144.19,135.29 64.39,215.09 -1170.1,215.09 -1200,185.19 K1.5 -1079.96,110.08 -1045,75.12 -1045,-290.71 -1190,-435.71 K2.5
  other v2: -1132.38,-1571.44 -840.06,-1531.63 -494.3,-1515.91 -975.22,-1427.9 -1125.05,-1416.38 -691.28,-1406.95 -835.87,-1400.66 -540,-1400.66 -185.05,-1394.51 -696.52,-1288.62 -836.92,-1281.22 -550,-1281.22 -998.27,-1278.07 -155.85,-1249.81 -5.58,-1233.21 -835,-1167.05 -696.52,-1164.92 -550,-1164.92 -175.13,-1087.48 -26.54,-1084.62
VO+: K1.2 K2.2 U5.3 U5.4
  other v2: -967.6,-990.32 -646.61,-930.32 -964.74,-851.26 -754.24,-816.02 -645,-816.02 -540,-816.02 -885,-808.62 -442.77,-733.15 -964.74,-698.62 -499.92,-661.71 -346.57,-646.47 -191.31,-642.66 -325,-539.79 -179.88,-539.79 -959.02,-518.84 -955,-333.62 -959.02,-159.75 -801.86,-154.03
pads on no net: U2.0 U2.3 U2.4 U2.11 U2.14 U2.15 U2.16 U2.17 U2.21 U2.22 U2.25 U2.26 U2.27 U2.28 U2.29 U2.33 U2.38 U2.39 U2.40 U2.41 U2.42 U2.43 U2.45 U2.46 U3.7 U3.9

## Polygon pours and split planes (outlines as drawn)
GND on Top Layer "Top Layer-No Net" (solid, remove dead copper, pour order 0): -2375.91,-3765.65 -2354.73,-3744.47 -595.6,-3765.65 -595.6,-3137.4 219.27,-3137.4 219.27,-3409.23 401.8,-3409.23 401.8,-2951.87 1629.55,-2951.87 1696.65,-69.11 1188.24,439.3 1103.51,524.04 -2450.05,524.04 -2450.05,-3654.44 -2344.13,-3760.36
GND on Bottom Layer "Top Layer-No Net" (solid, remove dead copper, pour order 4): -2375.91,-3760.65 -2354.73,-3739.47 -595.6,-3760.65 -595.6,-3132.4 219.27,-3132.4 219.27,-3404.23 481.27,-3404.23 481.27,-2946.87 1629.55,-2946.87 1696.65,-64.11 1188.24,444.3 1103.51,529.04 -2450.05,529.04 -2450.05,-3649.44 -2344.13,-3755.36

## Keep-outs
Keep-Out Layer:
  circle w10: c432.07,-118.11 r50
  circle w10: c-39.93,-1575.11 r50
  lines w5: -2128.9,-3693.22 1009,-3693.22 1009,232.81 -2128.9,232.81 -2128.9,-3693.22

## Other copper
Top Layer:
  rectangle net GND: -809.64,-2624.4 -682.87,-2080.61
  rectangle net GND: -986.71,-2382.36 -491.13,-2307.97
  rectangle net NetC32_2: 706.69,-3678.62 995,-2988.62
  rectangle net GND: -2034,-1602 -1772,-1554
  rectangle net GND: -1955,-1981 -1892,-1516
  rectangle net GND: -2035,-1759 -1807,-1708
  rectangle net GND: -2025,-1914 -1808,-1870
  rectangle net GND: -1621,-1608 -1514,-1478
  rectangle net GND: -1517,-1585 -1481,-1512
  rectangle net GND: -235,-108 -146,12
  region net VO+: -660,-98.62 -1115,-98.62 -1115,-1038.62 -580,-1038.62 -272.38,-731 -120,-731 -120,-830 33.62,-830 55,-808.62 55,-598.62 -35,-508.62 -435,-508.62 -640,-713.62 -850,-713.62 -880,-683.62 -880,-413.62 -845,-378.62 -675,-378.62 -645,-348.62 -645,-113.62
  region net NetJ3_1: -1445,-478.62 -1215,-708.62 -1215,-798.62 -1350,-933.62 -1925,-933.62 -1965,-893.62 -1965,-518.62 -1925,-478.62
  region net NetJ3_4: -1395,116.38 -1230,-48.62 -1230,-193.62 -1495,-458.62 -1905,-458.62 -1945,-418.62 -1945,56.38 -1885,116.38
  region net NetK1_3: -860,-418.62 -860,-678.62 -841.62,-697 -646,-697 -442.62,-493.62 -250,-493.62 -250,211.38 -850,211.38 -890,171.38 -890,-43.62 -860,-73.62 -630,-73.62 -615,-88.62 -615,-363.62 -645,-393.62 -835,-393.62
  region net NetJ1_4: -1440,-1063.62 -1440,-1360 -1661.38,-1360 -1800,-1498.62 -2005,-1498.62 -2005,-1063.62
  region net VDD12V: -301.62,-1063.62 -83,-845 36.38,-845 85,-893.62 85,-1238.62 -291.38,-1615 -1215,-1615 -1215,-1783.62 -1385,-1783.62 -1385,-1578.62 -1385,-1113.62 -1335,-1063.62
  region net NetK1_3: -350,-118.62 -255,-118.62 -250,-123.62 -165,-123.62 -155,-133.62 -155,-193.62 -175,-213.62 -335,-213.62 -350,-198.62
  region net VDD12V: -1565,-1400 -1540,-1375 -1430,-1375 -1360,-1305 -1360,-1610 -1510,-1460 -1555,-1460 -1565,-1450
Bottom Layer:
  rectangle net GND: -1940,-1967 -1894,-1553
  rectangle net GND: -2040,-1597 -1798,-1555
  rectangle net GND: -2029,-1759 -1809,-1717
  rectangle net GND: -2034,-1915 -1796,-1873
  region net NetJ3_4: -1403.91,99.28 -1241.92,-62.72 -1241.92,-142.4 -1569.16,-315.2 -1569.16,-450.45 -1889.24,-450.45 -1927.62,-412.07 -1927.62,42.68 -1871.02,99.28
  region net NetJ3_1: -1362.02,-561.6 -1229.9,-693.72 -1229.9,-780.9 -1367.35,-918.35 -1935.27,-918.35 -1945,-908.62 -1945,-561.6
  region net VDD12V: -461.72,-1097.93 -461.72,-1610.11 -1155.1,-1610.11 -1155.09,-1348.72 -904.3,-1097.93
  region net NetK1_3: -860,-418.62 -860,-678.62 -841.62,-697 -652,-697 -448.62,-493.62 -250,-493.62 -250,187 -874.38,187 -890,171.38 -890,-43.62 -860,-73.62 -630,-73.62 -615,-88.62 -615,-363.62 -645,-393.62 -835,-393.62
  region net VO+: -660,-98.62 -1018,-98.62 -1018,-1038.62 -580,-1038.62 -275,-733.62 -120,-733.62 -120,-833.62 30,-833.62 55,-808.62 55,-598.62 -35,-508.62 -435,-508.62 -640,-713.62 -850,-713.62 -880,-683.62 -880,-413.62 -845,-378.62 -675,-378.62 -645,-348.62 -645,-113.62
  region net NetJ1_4: -1440,-1063.62 -1440,-1360 -1666.38,-1360 -1805,-1498.62 -2005,-1498.62 -2005,-1063.62
  region net NetK1_3: -350,-118.62 -255,-118.62 -250,-123.62 -165,-123.62 -155,-133.62 -155,-193.62 -175,-213.62 -335,-213.62 -350,-198.62

## Silkscreen, mask and mechanical layers (free items; w line width, h text height)
Top Overlay:
  text "+" at -1526.5,-99.33 h40
  text "+" at -1512.53,-253.21 h40
  text "+" at -1519,-410.72 h40
  text "-" at -1531,-548.53 h40
  text "-" at -1531,-701.62 h40
  text "-" at -1531,-850.21 h40
  text "12V" at -1688.84,-1152.17 h40
  text "12V" at -1688.84,-1297.79 h40
  text "12V" at -1690,-1441.42 h40
  text "GND" at -1705.24,-1606.37 h40
  text "GND" at -1704,-1840 h40
  text "GND" at -1702,-1953 h40
  text "A" at -916,-3388 h50
  text "B" at -1037,-3395 h50
Bottom Overlay:
  circle w10: c4933.07,-329.11 r50
  circle w10: c4461.07,-1786.11 r50
  rectangle: -994.34,-2876.54 -141.32,-2028.29
  lines w5: -1300,-1771.65 629.13,-1771.65 629.13,39.37 -0.79,39.37 -0.79,-1023.62 -1300,-1023.62 -1300,-1771.65 ; 3201,-1982.65 3201,-1234.62 4500.21,-1234.62 4500.21,-171.63 5130.13,-171.63 5130.13,-1982.65 3201,-1982.65
  text "ELE MODULE V1.0 20210823" at -18.13,-1877.45 h80
  text "232_RXD" at 29.47,-2996.35 h40 r90
  text "232_TXD" at 145.83,-3000.36 h40 r90
  text "485_A" at 251.18,-3080.92 h40 r90
  text "GND" at 379.34,-3163.85 h40 r90
  text "485_A" at -885.54,-3176.48 h40 r90
  text "485_B" at -986.12,-3185.38 h40 r90
  text "GND" at -789.18,-3185.39 h40 r90
  text "GND" at -1519.85,-3269.54 h40 r90
  text "TXD" at -1425.33,-3270.91 h40 r90
  text "RXD" at -1308,-3280.62 h40 r90
  text "485_B" at -122.53,-3437.4 h40 r90
Bottom Solder:
  rectangle: -164.53,-473.31 83.94,-323.35
  region: -1362.02,-561.6 -1229.9,-693.72 -1229.9,-791.02 -1357.23,-918.35 -1935.27,-918.35 -1945,-908.62 -1945,-561.6
  region: -1403.91,97.81 -1241.92,-64.18 -1241.92,-143.87 -1569.16,-316.67 -1569.16,-451.92 -1889.24,-451.92 -1927.62,-413.54 -1927.62,41.21 -1871.02,97.81
  region: -849.37,-428.05 -849.37,-689.26 -835,-703.62 -676.09,-703.62 -446.17,-473.71 -250,-473.71 -250,171.38 -876.74,171.38 -876.74,-36.31 -853.11,-59.94 -621.23,-59.94 -590.53,-90.64 -590.53,-370.59 -632.49,-412.55 -833.87,-412.55
  region: -660,-98.62 -1025,-98.62 -1025,-1022.83 -575.35,-1022.83 -278.19,-725.67 -112.9,-725.67 -112.9,-827.01 28.32,-827.01 42.41,-812.92 42.41,-600.6 -28.07,-530.12 -434.68,-530.12 -638.18,-733.62 -854.99,-733.62 -896.08,-692.53 -896.08,-410.72 -854.82,-369.46 -665.84,-369.46 -645,-348.62 -645,-113.62
Mechanical 1:
  circle w10: c-39.37,-1574.8 r50
  circle w10: c433.07,-118.11 r50
  lines w5: -2135,-3698.62 -2135,238.39 1014.61,238.39 1014.61,-3698.62 -2135,-3698.62

## Text inside footprints (layer, text, board x,y; h text height)
C1: Top Overlay "+" at -1013,-1586.62 h60 r90
C2: Top Overlay "+" at -1916.62,-2870.91 h50
K1: Top Overlay "COM" at -980.18,-86.17 h31.5 r270
K2: Top Overlay "COM" at -970.18,-729.87 h31.5 r270